# EAGLE board TShukla_controller_board_brd (EAGLE 7.1.0)

Size 185 x 33 mm. Coordinates in mm from the lower left corner, seen from the top.
Outline: 158,22 158,33 35,33 35,20 0,20 0,0 185,0 185,22 158,22
Copper layers (1*16): Top 0.035559375mm / dielectric 1.501140625mm / Bottom 0.035559375mm
Design rules "4pcb-33board *": minimum track width 0.2mm, minimum drill 0.9mm, track to track 12mil, track to pad 12mil, pad to pad 12mil, via to via 12mil, smd to smd 12mil, copper to edge 10mil, drill to drill 10mil, minimum pad ring 10mil, minimum via ring 8mil, stop-mask expansion 4mil, vias tented up to drill 0mil, thermal gap 10mil

## Footprints (pad centres in the part's own frame; a part is rotated, then mirrored left to right if it is on the bottom)
1X01 = drill 1.016 pad 1.88: 1 0,0
JST-3-PTH-REVERSE = drill 0.7 pad 1.6: 1 -2,0; 2 0,0; 3 2,0
JST-3-PTH = drill 0.7 pad 1.6: 1 -2,0; 2 0,0; 3 2,0
1X02_NO_SILK = drill 1.016 pad 1.88: 1 0,0; 2 2.54,0
1X04 = drill 1.016 pad 1.88 square: 1 0,0 | drill 1.016 pad 1.88: 2 2.54,0; 3 5.08,0; 4 7.62,0
AXIAL-0.4 = drill 0.9 pad 1.88: P$1 -5.08,0; P$2 5.08,0
CONNECTOR_BOARD_OUTLINE = hole 2.8: 154,45; 71,29
BUTTON-TACTILE-SQUARE-ADAFRUIT1010 = drill 1.4 square: P -6,2.5 | drill 1.4: P2 6,2.5; S -6,-2.5; S2 6,-2.5 | hole 1.4: 0,-4.5; 0,4.5
DIODE(SMB) = smd 2.2 x 1.5: P$1 0,2.15; P$2 0,-2.55

## Placement (x,y rotation side)
BUTTON  [1X01]  124.66,27.9 0 top
J1  JST_3PIN_GND_VDD_SIG  [JST-3-PTH-REVERSE]  154,29 90 top
J2  JST_3PIN_GND_VDD_SIG  [JST-3-PTH-REVERSE]  168,6 180 top
J3  JST_3PIN_GND_VDD_SIG  [JST-3-PTH-REVERSE]  39,27 270 top
J4  JST_3PIN_GND_VDD_SIG  [JST-3-PTH-REVERSE]  51,27 270 top
J5  GIMBAL_3PIN_MATCH_TDOCU  [JST-3-PTH]  101,5 90 bottom
JP1  [1X02_NO_SILK]  73,30 270 top
JP2  [1X01]  137,30 0 top
JP6  [1X04]  94,23 90 top
R5  ~10k  [AXIAL-0.4]  111.01,27.94 0 top
U$1  [CONNECTOR_BOARD_OUTLINE]  -32,-22 0 top
U$2  BUTTON-TACTILE-SQUARE  [BUTTON-TACTILE-SQUARE-ADAFRUIT1010]  120.72,9.17 180 top
U$3  THROUGH_HOLE_RESISTOR  [DIODE(SMB)]  52.58,10.72 0 top
U$4  THROUGH_HOLE_RESISTOR  [DIODE(SMB)]  66.05,20.89 0 top

## Library data of the parts
BUTTON JP1 JP2 JP6 = SparkFun-Connectors
J1-J5 U$1 U$2 = Controller
R5 = SparkFun-Resistors
U$3 U$4 = IMUPackage

## Nets
3.3V: J1.2 J2.2 J3.2 J4.2 J5.1 JP1.2 U$2.P U$2.P2 U$3.P$1 U$4.P$1
GND: J1.1 J2.1 J3.1 J4.1 J5.2 JP1.1 R5.P$1
N$6: BUTTON.1 R5.P$2 U$2.S U$2.S2
N$9: J5.3 JP2.1
PITCH: JP6.1 U$4.P$2
ROLL: JP6.2 U$3.P$2
THROTTLE: J3.3 JP6.3
YAW: J4.3 JP6.4

## Tracks (layer width: path | path; a pad name or v marks a point on that pad's centre or on a via)
3.3V  (9 unrouted)
GND  (6 unrouted)
N$6  (3 unrouted)
N$9  (1 unrouted)
PITCH  (1 unrouted)
ROLL  (1 unrouted)
THROTTLE  (1 unrouted)
YAW  (1 unrouted)